# Altium PCB FSFB_SMPS.PcbDoc (part 1 of 2)
Units mm, origin at the board's own origin, x right, y up, seen from the top; angles counter-clockwise.
Board outline 100 x 100 mm, 2 copper layers (Top Layer, Bottom Layer); 97 components, 60 nets, 269 pads, 45 vias.
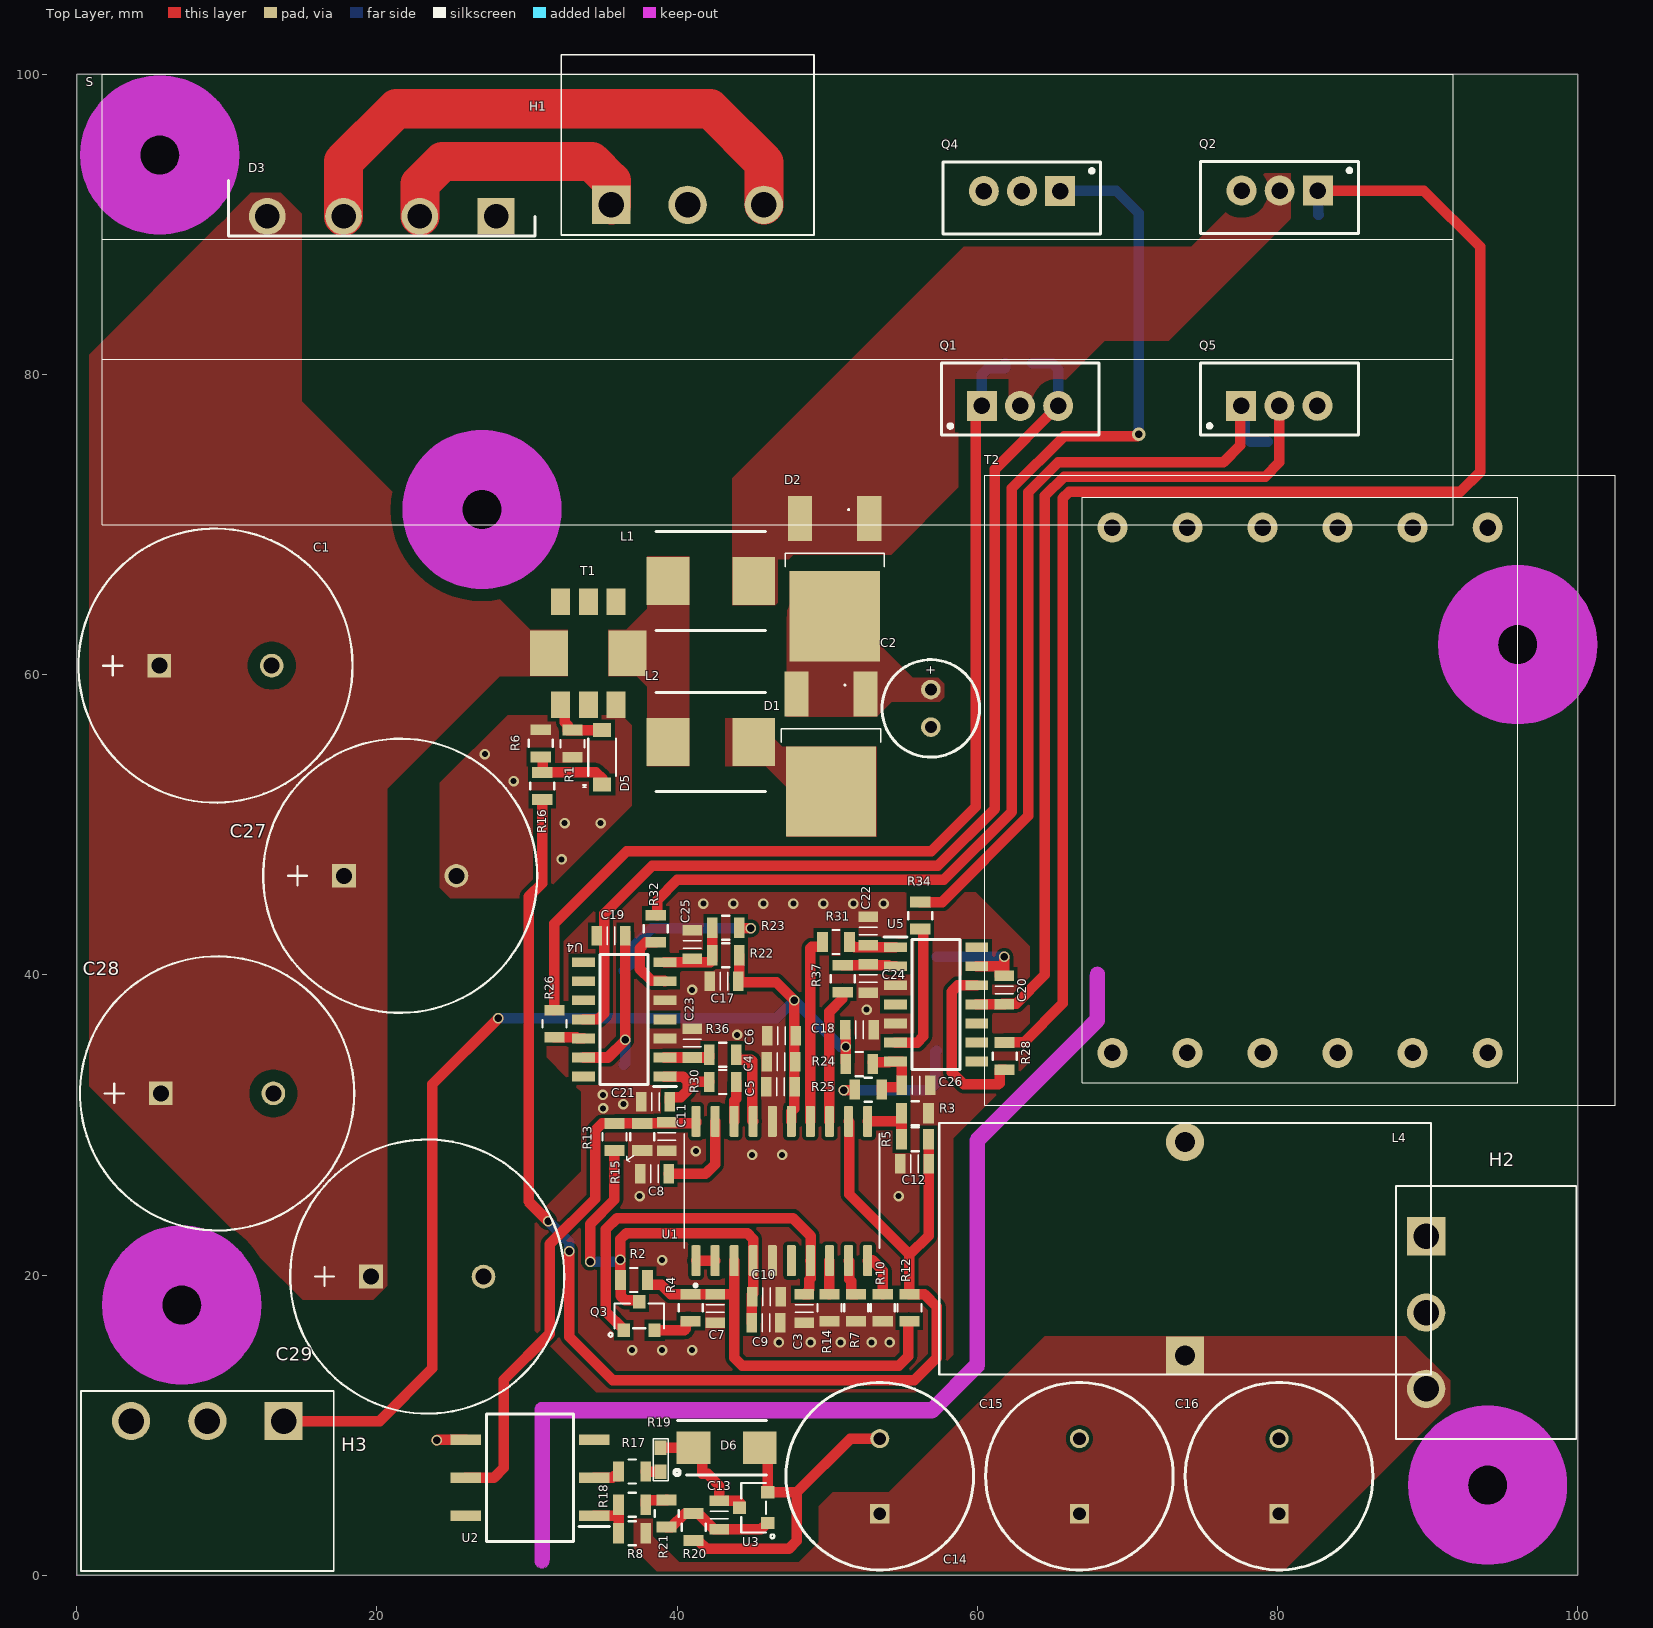
[diagram p0: Top Layer view]
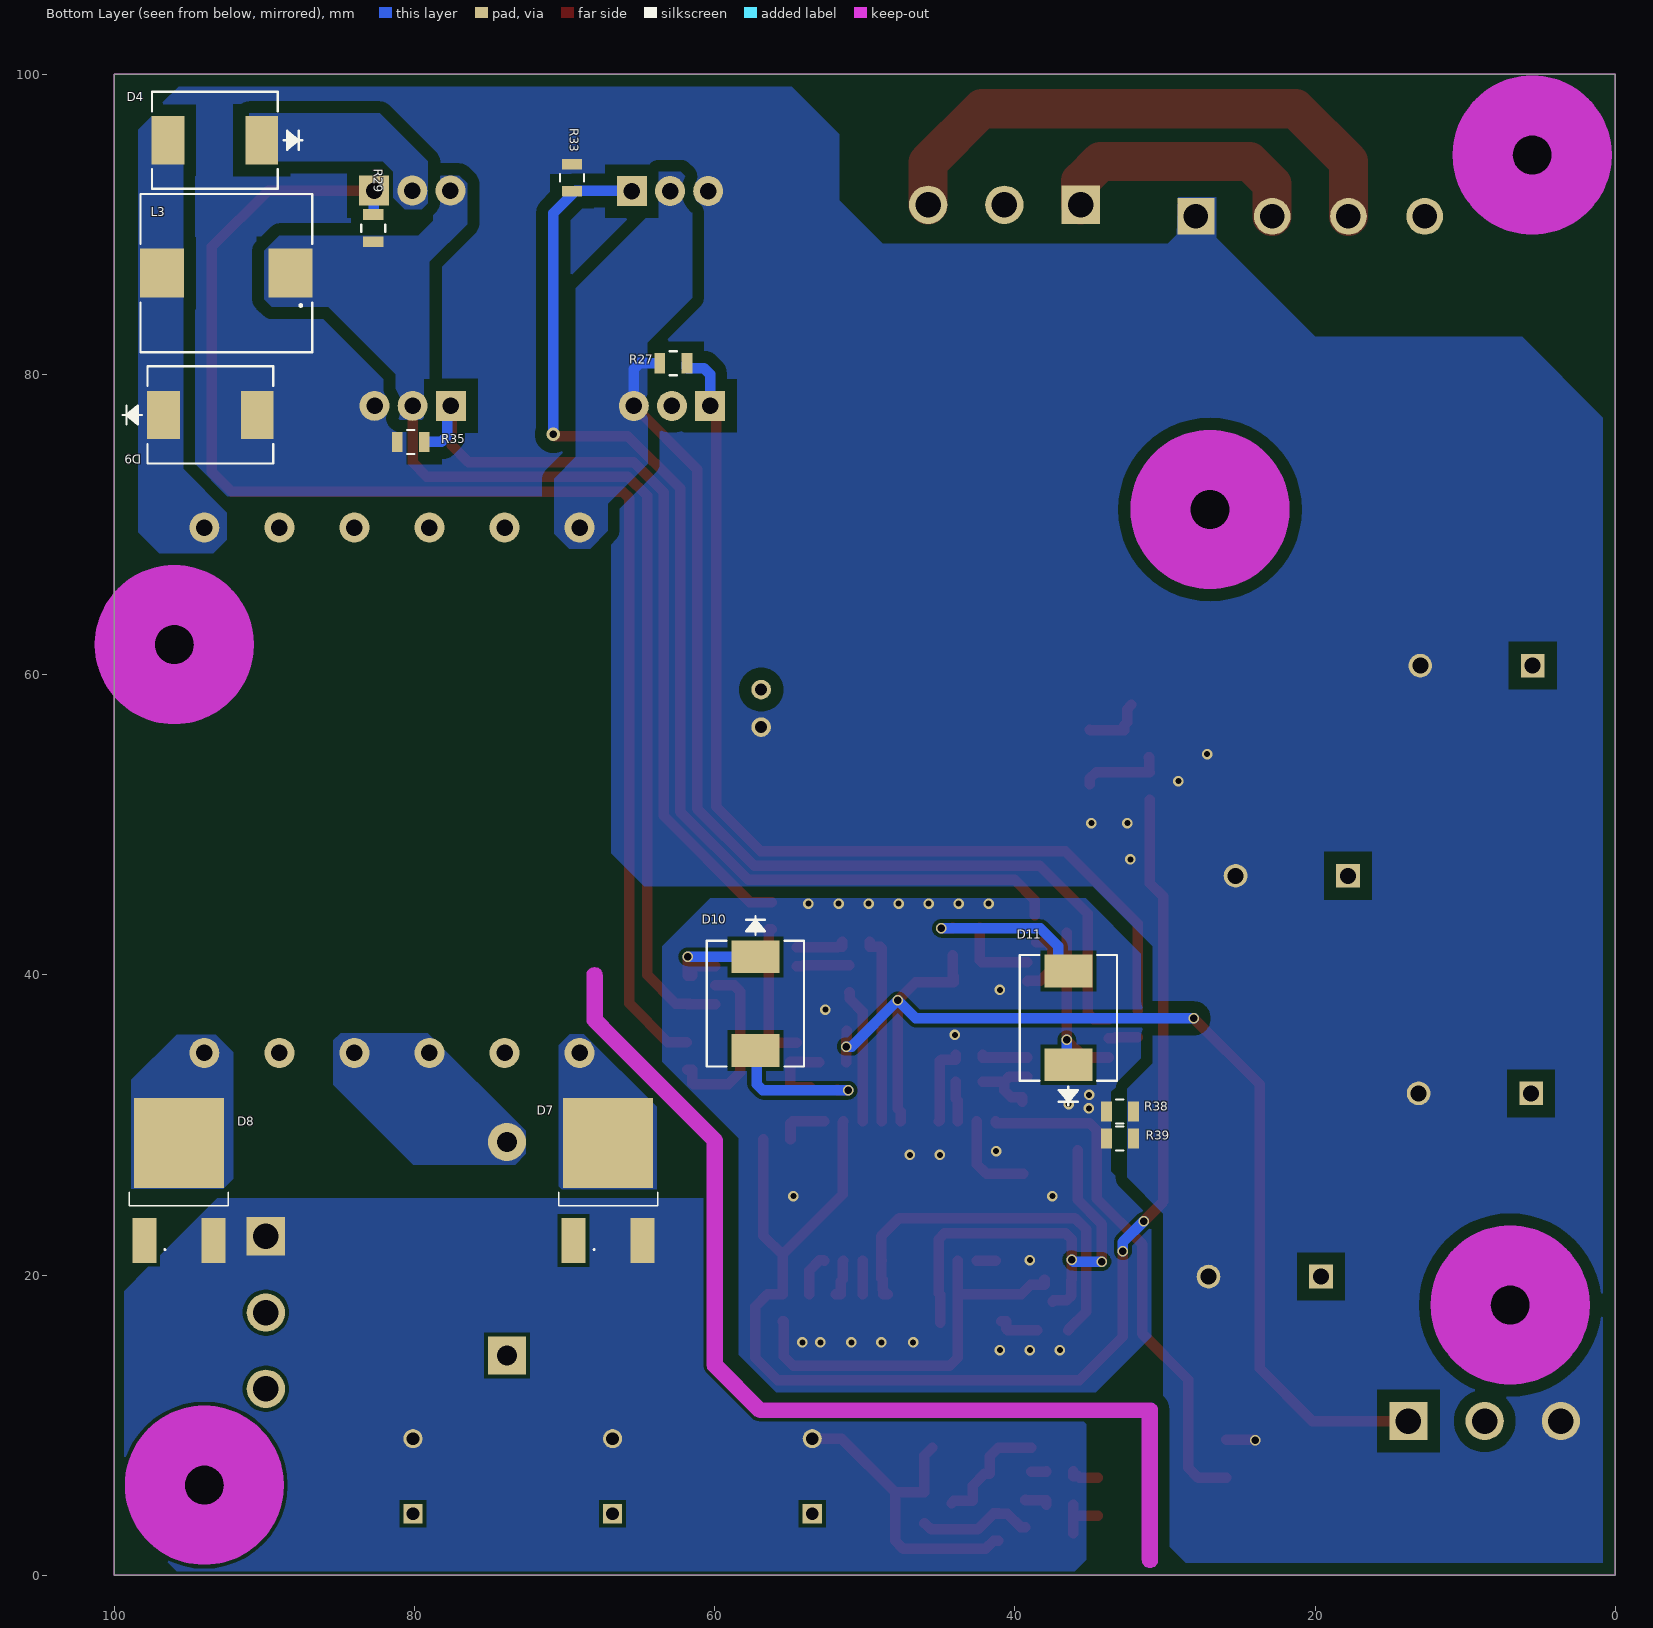
[diagram p1: Bottom Layer view, seen from below]
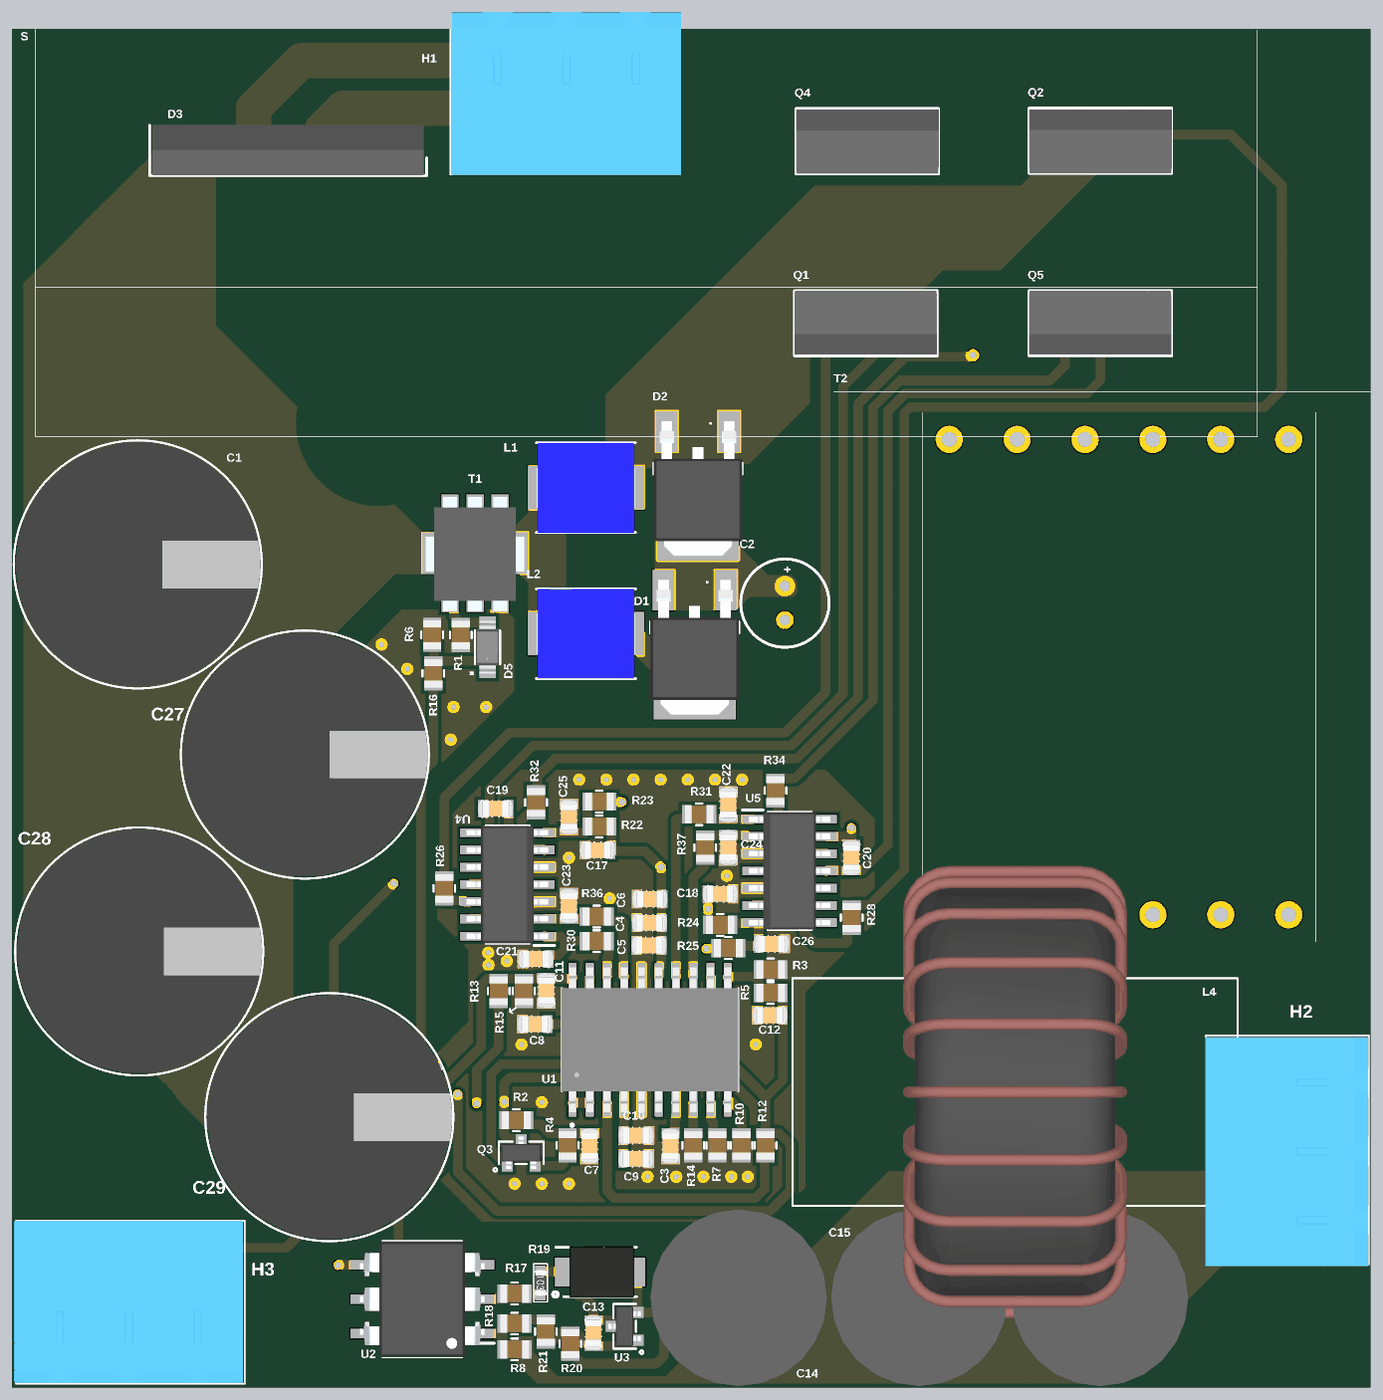
[diagram p2: 3D render of the assembled board from above, using the file's embedded part models]
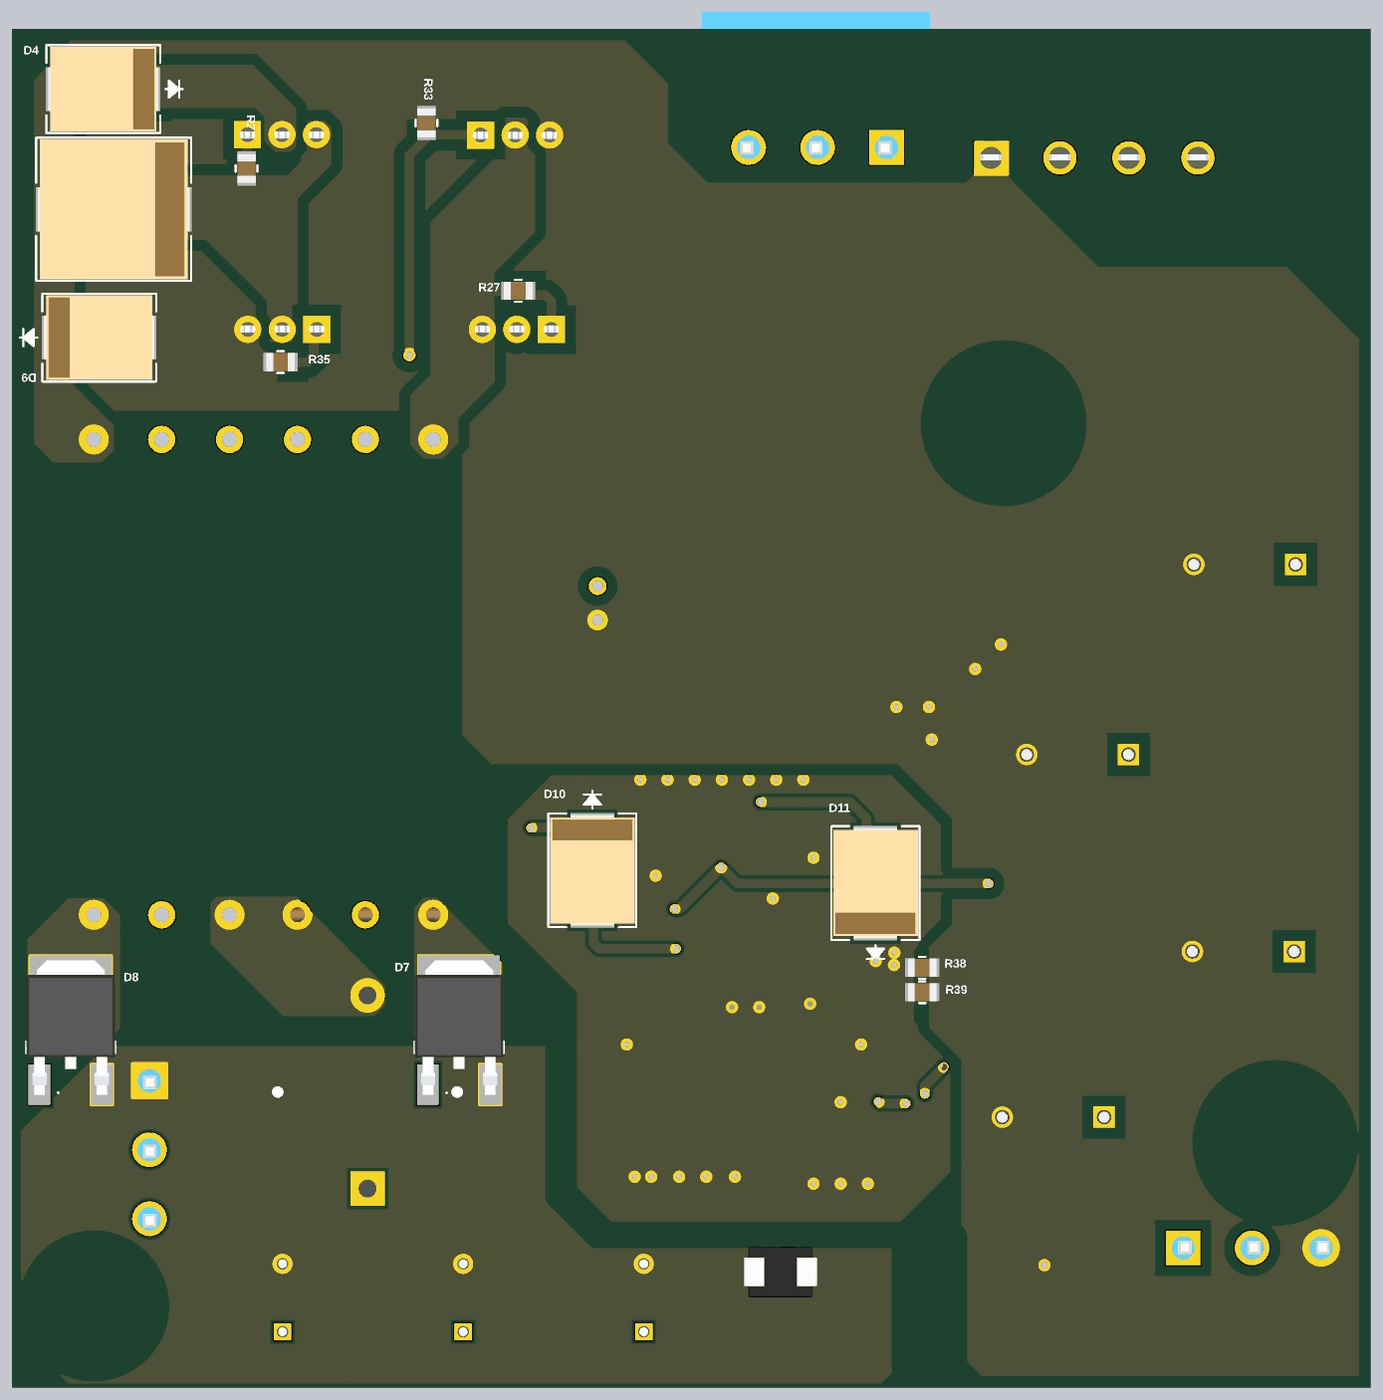
[diagram p3: 3D render of the assembled board from below, using the file's embedded part models]

## Layer stack, top to bottom
Top Solder: solder mask 0.0102, Solder Resist, Dk 3.5
Top Layer: signal copper 0.0356
Dielectric 1: dielectric 0.32, FR-4, Dk 4.8
Bottom Layer: signal copper 0.0356
Bottom Solder: solder mask 0.0102, Solder Resist, Dk 3.5

## Board outline
0,0 0,100 100,100 100,0
cut-out: 31.5,1 31.5,10.5 57,10.5 ccw(c57,11) 57.354,10.646 60.354,13.646 ccw(c60,14) 60.5,14 60.5,28.793 67.354,35.646 68.354,36.646 ccw(c68,37) 68.5,37 68.5,40 ccw(c68,40) 67.5,40 67.5,37.207 66.646,36.354 59.646,29.354 ccw(c60,29) 59.5,29 59.5,14.207 56.793,11.5 31,11.5 ccw(c31,11) 30.5,11 30.5,1 ccw(c31,1)
cut-out: 27,67.7 cw(c27,71) 23.7,71 cw(c27,71) 27,74.3 cw(c27,71) 30.3,71 cw(c27,71)
cut-out: 96,58.7 cw(c96,62) 92.7,62 cw(c96,62) 96,65.3 cw(c96,62) 99.3,62 cw(c96,62)
cut-out: 5.534,91.314 cw(c5.534,94.614) 2.234,94.614 cw(c5.534,94.614) 5.534,97.914 cw(c5.534,94.614) 8.834,94.614 cw(c5.534,94.614)
cut-out: 94,2.7 cw(c94,6) 90.7,6 cw(c94,6) 94,9.3 cw(c94,6) 97.3,6 cw(c94,6)
cut-out: 7,14.7 cw(c7,18) 3.7,18 cw(c7,18) 7,21.3 cw(c7,18) 10.3,18 cw(c7,18)

## Design rules (kind name [scope] priority, off if disabled: settings)
Clearance HSAB [InNet('HSAB') And OnLayer('Bottom Layer')] p1: gap=0.8 ignorepadtopadclearanceinfootprint=FALSE except(1.5: THPad-Via)
Clearance NETD2_1 [InNet('NetD2_1') And OnLayer('Top Layer')] p2: gap=0.8 ignorepadtopadclearanceinfootprint=FALSE except(1.5: THPad-Via)
Clearance RectAC [InNet('RectACLine') And OnLayer('Top Layer')] p3: gap=0.8 ignorepadtopadclearanceinfootprint=FALSE except(1.5: THPad-THPad)
Clearance HSCD [InNet('HSCD') And OnLayer('Bottom Layer')] p4: gap=0.8 ignorepadtopadclearanceinfootprint=FALSE except(1.5: THPad-THPad)
Clearance GNDHV_B [InNet('GND_HV') And OnLayer('Bottom Layer')] p5: gap=0.8 ignorepadtopadclearanceinfootprint=FALSE
Clearance [All] p6: gap=0.254 ignorepadtopadclearanceinfootprint=FALSE except(0.1: Arc-Text Track-Text SMDPad-Text THPad-Text Via-Text Fill-Text Poly-Text Region-Text Text-Text)
Height [All] p1: minheight=0 maxheight=70 prefheight=12.7
MinimumSolderMaskSliver [All] p1: minsoldermaskwidth=0.1
PolygonConnect [All] p1: connectstyle=Direct reliefconductorwidth=0.254 reliefentries=4 polygonreliefangle="90 Angle" airgapwidth=0.254
RoutingVias [All] p1: holewidth=0.4 width=0.7 viastyle="Through Hole" minholewidth=0.2 minwidth=0.3 maxholewidth=1 maxwidth=3
SilkToSolderMaskClearance [IsPad] p1: minsilkscreentomaskgap=0.05 clearancetoexposedcopper=TRUE
SolderMaskExpansion [All] p1: expansion=0.102 istentingtop=FALSE
Width [All] p1: maxlimit=7 minlimit=0.254 preferedwidth=0.6
27 further rules are at their usual default settings.

## Components (designator, comment, footprint, x,y, rotation, side; value= is the part's Value field where it differs from the comment)
C1 "120uF" 18AL_CAP 5.5,60.6 r0 top
C2 "0.47uF" 860021373001_PCB 56.9,57.75 r90 top
C3 "560pF" CAP_0805 48.475,17.775 r90 top
C4 "100nF" CAP_0805 46.925,34.216 r0 top
C5 "1uF" CAP_0805 46.9,32.55 r0 top
C6 "4.7uF" CAP_0805 46.959,35.957 r0 top
C7 "56pF" CAP_0805 42.525,17.775 r90 top
C8 "560pF" CAP_0805 38.5,26.75 r0 top
C9 "1uF" CAP_0805 45.934,16.837 r180 top
C10 "100nF" CAP_0805 45.947,18.543 r180 top
C11 "68nF" CAP_0805 39.325,29.225 r90 top
C12 "1uF" CAP_0805 55.8,27.4 r180 top
C13 "22nF" CAP_0805 42.8,4 r90 top
C14 "47uF" CAP200V47uF 53.5,4.1 r90 top
C15 "47uF" CAP200V47uF 66.8,4.1 r90 top
C16 "47uF" CAP200V47uF 80.1,4.1 r90 top
C17 "1uF" CAP_0805 43.112,39.569 r0 top
C18 "1uF" CAP_0805 52.135,36.34 r180 top
C19 "100nF" CAP_0805 35.6,42.6 r0 top
C20 "100nF" CAP_0805 61.8,39 r90 top
C21 "220pF" CAP_0805 38.555,31.545 r0 top
C22 "220pF" CAP_0805 52.724,42.907 r270 top
C23 "220pF" CAP_0805 40.996,35.443 r270 top
C24 "220pF" CAP_0805 52.724,39.761 r90 top
C25 "1uF" CAP_0805 40.996,42.006 r270 top
C26 "1uF" CAP_0805 55.918,32.658 r180 top
C27 "120uF" 18AL_CAP 17.807,46.6 r0 top
C28 "120uF" 18AL_CAP 5.607,32.1 r0 top
C29 "120uF" 18AL_CAP 19.607,19.9 r0 top
D1 "" DPAK(TO-252-2) 50.25,54.5 r180 top
D2 "" DPAK(TO-252-2) 50.5,66.19 r180 top
D3 "=Value" 4-SIP 27.937,90.532 r180 top
D4 "=Value" DO-214AB(SMC) 93.3,95.6 r0 bottom
D5 "=Value" SOD123 35,54.5 r90 top
D6 "=Value" DO_214AA 43.3,8.5 r0 top
D7 "=Value" DPAK(TO-252-2) 67.1,26.5 r180 bottom
D8 "=Value" DPAK(TO-252-2) 95.7,26.5 r180 bottom
D9 "=Value" DO-214AB(SMC) 93.6,77.3 r180 bottom
D10 "=Value" DO-214AB(SMC) 57.285,38.078 r270 bottom
D11 "=Value" DO-214AB(SMC) 36.437,37.134 r90 bottom
H1 "=Value" "3 x 5.08 POS" 35.62,91.3 r0 top
H2 "=Value" "3 x 5.08 POS" 89.9,22.58 r270 top
H3 "=Value" "3 x 5.08 POS" 13.782,10.275 r180 top
L1 "0.1UF" "7.30mm x 6.60mm" 42.25,66.25 r0 top
L2 "220nF" "7.30mm x 6.60mm" 42.25,55.5 r0 top
L3 "3.3uH" "14.4MOHM SMD" 92.53,86.75 r0 bottom
L4 "180uH" 2300HT-181-V-RC 74.35,21.5 r90 top
Q1 "=Value" TO220 62.849,77.904 r90 top
Q2 "=Value" TO220 80.142,92.245 r270 top
Q3 "=Value" SOT-23-3 37.475,17.275 r0 top
Q4 "=Value" TO220 62.975,92.215 r270 top
Q5 "=Value" TO220 80.122,77.908 r90 top
R1 "2K" RES_0805 33.036,55.404 r270 top
R2 "10K" RES_0805 37.125,19.675 r180 top
R3 "0R" RES_0805 55.85,30.775 r0 top
R4 "2K" RES_0805 40.9,17.825 r270 top
R5 "0R" RES_0805 55.85,29.05 r0 top
R6 "20R" RES_0805 30.922,55.418 r90 top
R7 "15K" RES_0805 51.925,17.825 r90 top
R8 "50R" RES_0805 37,2.8 r0 top
R10 "15K" RES_0805 53.7,17.825 r90 top
R12 "510R" RES_0805 55.475,17.825 r270 top
R13 "2K" RES_0805 35.825,29.2 r270 top
R14 "82K" RES_0805 50.15,17.825 r90 top
R15 "5.1K" RES_0805 37.675,29.2 r90 top
R16 "1K" RES_0805 31.011,52.581 r90 top
R17 "12K" RES_0805 37,6.912 r180 top
R18 "470K" RES_0805 37,4.7 r180 top
R19 "1.87K" RES_0603 38.9,7.7 r270 top
R20 "10K" RES_0805 41.1,3.212 r90 top
R21 "82K" RES_0805 39.301,4.114 r90 top
R22 "5R" RES_0805 43.238,41.303 r180 top
R23 "2R" RES_0805 43.238,43.139 r0 top
R24 "5R" RES_0805 52.135,34.053 r0 top
R25 "2R" RES_0805 52.735,32.353 r180 top
R26 "5R" RES_0805 31.825,36.75 r90 top
R27 "10K" RES_0805 62.75,80.75 r0 bottom
R28 "5R" RES_0805 61.82,34.588 r90 top
R29 "10K" RES_0805 82.75,89.75 r270 bottom
R30 "50R" RES_0805 43.038,32.861 r180 top
R31 "50R" RES_0805 50.585,42.194 r0 top
R32 "5R" RES_0805 38.575,43.075 r90 top
R33 "10K" RES_0805 69.5,93.1 r90 bottom
R34 "5R" RES_0805 56.204,43.95 r90 top
R35 "10K" RES_0805 80.25,75.5 r0 bottom
R36 "50R" RES_0805 43.038,34.674 r180 top
R37 "50R" RES_0805 51.032,39.748 r90 top
R38 "0R" RES_0805 33,30.9 r180 bottom
R39 "0R" RES_0805 33,29.1 r180 bottom
S "=Value" Sogutucu60x90 91.698,85 r180 top
T1 "1:100" PA1005.100QNLT 34.089,61.265 r0 top
T2 "=Value" FE0270 69,69.8 r0 top
U1 "UCC3895PWTR" 20-SOIC 46.975,25.6 r90 top
U2 "=VAlue" CNY172SM_FP 30.2,6.5 r180 top
U3 "=Value" SOT-23-3 45.1,4.5 r90 top
U4 "=Value" 14-SOP 36.47,37.033 r180 top
U5 "=Value" 14-SOP 57.253,38.029 r0 top

## Footprints (in the part's own frame and the unit in brackets; to place one, negate y for a bottom-side part, rotate by r counter-clockwise, add the part's x,y. Pads: shape width x height; smd on the part's side, far side on the other; paste and mask are expansions set on the pad)
"3 x 5.08 POS" [mm]
  rect 2.55x2.55 / inner round 2.55 / far side rect 2.55x2.55 hole 1.7: 1(0,0)
  round 2.55 hole 1.7: 2(5.08,0) 3(10.16,0)
  silkscreen extent -3.34,-2 13.5,10, body extent -3.21,-2.03 13.63,9.97, height 8.5
4-SIP [mm]
  rect 2.445x2.445 / inner round 2.445 / far side rect 2.445x2.445 hole 1.63: 1(0,0)
  round 2.445 hole 1.63: 2(5.08,0) 3(10.16,0) 4(15.24,0)
  silkscreen extent -2.58,-2.4 17.82,1.3, body extent -2.38,-2.43 17.62,1.27, height 13.1
"7.30mm x 6.60mm" [mm]
  rect 2.85x3.2 smd: 1(-2.85,0) 2(2.85,0)
  silkscreen extent -3.65,-3.3 3.65,3.3, body extent -3.65,-3.3 3.65,3.3, height 3
14-SOP [mm]
  rect 1.525x0.65 smd: 1(-2.712,3.81) 2(-2.712,2.54) 3(-2.712,1.27) 4(-2.712,0) 5(-2.712,-1.27) 6(-2.712,-2.54) 7(-2.712,-3.81) 8(2.712,-3.81) 9(2.712,-2.54) 10(2.712,-1.27) 11(2.712,0) 12(2.712,1.27) 13(2.712,2.54) 14(2.712,3.81)
  silkscreen extent -3.47,-4.33 1.6,4.48, body extent -3.01,-4.33 3.01,4.33, height 1.75
"14.4MOHM SMD" [mil]
  rect 115x128 smd paste+0 mask+0: 1(-168.5,0) 2(168.5,0)
  silkscreen extent -225,-208 225,208, body extent -220,-202 220,202, height 160
18AL_CAP [mil]
  rect 62x62 / inner round 60 / far side rect 62x62 hole 42 paste-31 mask+0: 1(0,0)
  round 62 / inner round 60 / far side round 62 hole 42 paste-31 mask+0: 2(295,0)
  silkscreen extent -212,-359 507,359, body extent -207,-354 503,354, height 1231
20-SOIC [mm]
  rrect25% 2.06x0.6 smd: 1(-4.64,5.715) 2(-4.64,4.445) 3(-4.64,3.175) 4(-4.64,1.905) 5(-4.64,0.635) 6(-4.64,-0.635) 7(-4.64,-1.905) 8(-4.64,-3.175) 9(-4.64,-4.445) 10(-4.64,-5.715) 11(4.64,-5.715) 12(4.64,-4.445) 13(4.64,-3.175) 14(4.64,-1.905) 15(4.64,-0.635) 16(4.64,0.635) 17(4.64,1.905) 18(4.64,3.175) 19(4.64,4.445) 20(4.64,5.715)
  silkscreen extent -6.39,-6.5 3.8,6.5, body extent -5.32,-6.5 5.32,6.5, height 2.64
2300HT-181-V-RC [mil]
  rect 100x100 hole 52 paste-36 mask+0: 1(-270,20)
  round 100 hole 52 paste-36 mask+0: 2(290,20)
  silkscreen extent -320,-625 340,665, body extent -315,-636 335,676, height 1280
860021373001_PCB [mm]
  round 1.308 hole 0.8 mask+0.102: 1(1.25,0) 2(-1.25,0)
  silkscreen extent -3.25,-3.25 3.25,3.25, body extent -3.25,-3.25 3.25,3.25, height 11
CAP200V47uF [mm]
  rect 1.275x1.275 / inner round 1.275 / far side rect 1.275x1.275 hole 0.85: 1(0,0)
  round 1.275 hole 0.85: 2(5,0)
  silkscreen extent -3.75,-6.25 8.75,6.25, body extent -4,-6.5 9,6.5, height 20
CAP_0805 [mm]
  rect 0.7x1.3 smd mask+0.05: 1(-0.95,0) 2(0.95,0)
  silkscreen extent -0.25,-0.6 0.25,0.6, body extent -1.3,-0.68 1.3,0.68, height 0.9
CNY172SM_FP [mm]
  rect 2.05x0.7 smd: 1(-4.275,2.54) 2(-4.275,0) 3(-4.275,-2.54) 4(4.275,-2.54) 5(4.275,0) 6(4.275,2.54)
  silkscreen extent -5.3,-4.26 2.9,4.26, body extent -4.58,-4.26 4.58,4.26, height 4.8
DO-214AB(SMC) [mil]
  rect 86x126 smd paste+0 mask+0: 1(-123,0) 2(123,0)
  silkscreen extent -230,-128 165,128, body extent -160,-123 160,123, height 105
DO_214AA [mm]
  rect 2.25x2.15 smd: A(2.2,0) C(-2.2,0)
  silkscreen extent -3.48,-1.83 2.67,1.81, body extent -2.57,-1.9 2.83,1.91, height 0.94
DPAK(TO-252-2) [mm]
  rect 1.6x3 smd: 1(-2.3,-4.2) 3(2.3,-4.2)
  rect 6x6 smd: 2(0,2.3)
  silkscreen extent -3.3,-4.85 3.3,-1, body extent -3.27,-4.96 3.27,4.96, height 2.39
FE0270 [mm]
  round 2 hole 1.1: 1(0,0) 2(5,0) 3(10,0) 4(15,0) 5(20,0) 6(25,0) 7(25,-35) 8(20,-35) 9(15,-35) 10(10,-35) 11(5,-35) 12(0,-35)
  silkscreen extent -8.5,-38.5 33.5,3.5, body extent -8.5,-38.5 33.5,3.5, height 34.25
PA1005.100QNLT [mm]
  rect 1.27x1.78 smd: 1(-1.85,-3.273) 2(0,-3.273) 3(1.85,-3.273) 4(1.85,3.597) 5(0,3.597) 6(-1.85,3.597)
  rect 2.54x3.05 smd: 7(2.615,0.162) 8(-2.615,0.162)
  body extent -3.63,-4.11 3.63,4.29, height 5.1
RES_0603 [mil]
  rect 38x31 smd mask+1.97: 1(-31.5,0) 2(31.5,0)
  silkscreen extent -55,-20 55,20, body extent -39,-19 39,20, height 17
RES_0805 [mil]
  rect 28x53 smd paste+0 mask+0: 1(-35.5,0) 2(35.5,0)
  silkscreen extent -9,-32 9,32, body extent -41,-26 41,26, height 24
SOD123 [mil]
  rect 36.98x48 smd paste+0 mask+0: 1(-71.49,0) 2(71.49,0)
  silkscreen extent -79,-36 49,50, body extent -76,-31 76,31, height 53
Sogutucu60x90 [mm]
  silkscreen extent 0,-15 90,15, body extent 0,-15 90,15, height 60
SOT-23-3 [mil]
  rect 32x35 smd paste+0 mask+0: 1(-40.35,-37.2) 2(40.35,-37.2) 3(0,37.2)
  silkscreen extent -80,-54 65,33, body extent -57,-47 57,47, height 45
TO220 [mm]
  rect 2x2 hole 1.1 paste+0 mask+0: 1(0,2.54)
  round 2 hole 1.1 paste+0 mask+0: 2(0,0) 3(0,-2.54)
  silkscreen extent -1.95,-5.26 2.85,5.24, body extent -1.87,-5.25 2.84,5.25, height 18.01

## Part data
C1 C27 C28 C29: library part 63, "120 µF 400 V Aluminum Electrolytic Capacitors Radial, Can 12000 Hrs @ 105°C", Case/Package=Radial, Manufacturer=Nichicon, MANUFACTURER P/N=UCY2G121MHD, Manufacturer Part Number=EEV686M035A9HAA, Max Operating Temperature=105°C, Min Operating Temperature=-40°C, Package Quantity=1, Ripple Current=196mA, Supplier Part Number 1=493-5466-ND, Tolerance=20%, Voltage Rating=35V, Category="Aluminum Electrolytic Capacitors", ComponentLink1Description=datasheet, ComponentLink1URL=https://www.nichicon.co.jp/english/series_items/catalog_pdf/e-ucy.pdf, Designator by=BERK, Height - Seated (Max)=0.315inch, Length=7.7mm, Life (Hours)=2000Hour, Mount="Surface Mount", Packaging="Tape and Reel", Pricing 1="1=0,54000, 10=0,38000, 50=0,28740, 100=0,25040, 500=0,18546 (USD)", RoHS=Yes, RoHS Compliant=Yes, Series=EEV, Stoc Code=63, Stock 1=543, Supplier 1=Digikey, Termination=SMD/SMT, Voltage Rating (DC)=35V, Impedance=340mR
C2: library part 60, "0.47 µF 400 V Aluminum Electrolytic Capacitors Radial, Can 2000 Hrs @ 105°C", Case/Package=Radial, Manufacturer="Würth Elektronik", MANUFACTURER P/N=860021373001, Manufacturer Part Number=EEV686M035A9HAA, Max Operating Temperature=105°C, Min Operating Temperature=-40°C, Package Quantity=1, Ripple Current=196mA, Supplier Part Number 1=732-8879-1-ND, Tolerance=20%, Voltage Rating=35V, Category="Aluminum Electrolytic Capacitors", ComponentLink1Description=https://datasheet.ciiva.com/5365/kem-a4002-eev-535332-5365784.pdf?src-supplier=Mouser, ComponentLink1URL=https://datasheet.ciiva.com/5365/kem-a4002-eev-535332-5365784.pdf?src-supplier=Mouser, Designator by=BERK, Height - Seated (Max)=0.315inch, Length=7.7mm, Life (Hours)=2000Hour, Mount="Surface Mount", Packaging="Tape and Reel", Pricing 1="1=0,54000, 10=0,38000, 50=0,28740, 100=0,25040, 500=0,18546 (USD)", RoHS=Yes, RoHS Compliant=Yes, Series=EEV, Stoc Code=60, Stock 1=543, Supplier 1=Digikey, Termination=SMD/SMT, Voltage Rating (DC)=35V, Impedance=340mR
C3 C8: library part 27, "Cap.,SMD,0805,NP0,560pF,5%,100V", Case Code (Metric)=2012, Case Code (Imperial)=0805, Dielectric=X7R, Manufacturer=Aillen, MANUFACTURER P/N=0805N561J101AD, Manufacturer Part Number=CL21B105KBFNNNE, Max Operating Temperature=125°C, Min Operating Temperature=-55°C, Package Quantity=1, Supplier Part Number 1=3372-0805N561J101ADTR-ND, Tolerance=10%, Voltage=50V, Case/Package=0805, Category="Ceramic Capacitors", ComponentLink1Description=https://datasheet.ciiva.com/25800/cl21b105kbfnnne-25800291.pdf?src-supplier=Digi-Key, ComponentLink1URL=https://datasheet.ciiva.com/25800/cl21b105kbfnnne-25800291.pdf?src-supplier=Digi-Key, ComponentLink2Description=https://datasheet.ciiva.com/16449/cl21b105kbfnnne-16449003.pdf?src-supplier=Future+Electronics, ComponentLink2URL=https://datasheet.ciiva.com/16449/cl21b105kbfnnne-16449003.pdf?src-supplier=Future+Electronics, ComponentLink3Description=https://datasheet.ciiva.com/26838/getdatasheetpartid-354075-26838668.pdf?src-supplier=Verical, ComponentLink3URL=https://datasheet.ciiva.com/26838/getdatasheetpartid-354075-26838668.pdf?src-supplier=Verical, Construction=Flat, Depth=1.25mm, Designed by=BERK, Height=1.25mm, Length=2mm, Mount="Surface Mount", Packaging="Tape and Reel", Pricing 1="2000=0,02138, 4000=0,01956 (USD)", Radiation Hardening=No, RoHS=Yes, RoHS Compliant=Yes, Series=CL, Stoc Code=27, Stock 1=958000, Supplier 1=Digikey, Thickness=0.053inch, Voltage Rating=50V, Width=0.049inch
C4 C10 C19 C20: library part 31, "Auto. MLCC X7R 100nF 10% 100V 08", Case Code (Metric)=2012, Case Code (Imperial)=0805, Dielectric=X7R, Manufacturer="EYang Technology", MANUFACTURER P/N=E0805X7R104K101NTY, Manufacturer Part Number=CL21B105KBFNNNE, Max Operating Temperature=125°C, Min Operating Temperature=-55°C, Package Quantity=1, Supplier Part Number 1=3372-E0805X7R104K101NTYTR-ND, Tolerance=10%, Voltage=50V, Case/Package=0805, Category="Ceramic Capacitors", ComponentLink1Description=https://datasheet.ciiva.com/25800/cl21b105kbfnnne-25800291.pdf?src-supplier=Digi-Key, ComponentLink1URL=https://datasheet.ciiva.com/25800/cl21b105kbfnnne-25800291.pdf?src-supplier=Digi-Key, ComponentLink2Description=https://datasheet.ciiva.com/16449/cl21b105kbfnnne-16449003.pdf?src-supplier=Future+Electronics, ComponentLink2URL=https://datasheet.ciiva.com/16449/cl21b105kbfnnne-16449003.pdf?src-supplier=Future+Electronics, ComponentLink3Description=https://datasheet.ciiva.com/26838/getdatasheetpartid-354075-26838668.pdf?src-supplier=Verical, ComponentLink3URL=https://datasheet.ciiva.com/26838/getdatasheetpartid-354075-26838668.pdf?src-supplier=Verical, Construction=Flat, Depth=1.25mm, Designed by=BERK, Height=1.25mm, Length=2mm, Mount="Surface Mount", Packaging="Tape and Reel", Pricing 1="2000=0,02138, 4000=0,01956 (USD)", Radiation Hardening=No, RoHS=Yes, RoHS Compliant=Yes, Series=CL, Stoc Code=31, Stock 1=958000, Supplier 1=Digikey, Thickness=0.053inch, Voltage Rating=50V, Width=0.049inch
C5 C9 C12 C17 C18 C25 C26: library part 22, "CAP SMD,0805,X7R,1UF,10%,50V", Case Code (Metric)=2012, Case Code (Imperial)=0805, Dielectric=X7R, Manufacturer=Aillen, MANUFACTURER P/N=0805B105K500CC, Manufacturer Part Number=CL21B105KBFNNNE, Max Operating Temperature=125°C, Min Operating Temperature=-55°C, Package Quantity=1, Supplier Part Number 1=3372-0805B105K500CCTR-ND, Tolerance=10%, Voltage=50V, Case/Package=0805, Category="Ceramic Capacitors", ComponentLink1Description=https://datasheet.ciiva.com/25800/cl21b105kbfnnne-25800291.pdf?src-supplier=Digi-Key, ComponentLink1URL=https://datasheet.ciiva.com/25800/cl21b105kbfnnne-25800291.pdf?src-supplier=Digi-Key, ComponentLink2Description=https://datasheet.ciiva.com/16449/cl21b105kbfnnne-16449003.pdf?src-supplier=Future+Electronics, ComponentLink2URL=https://datasheet.ciiva.com/16449/cl21b105kbfnnne-16449003.pdf?src-supplier=Future+Electronics, ComponentLink3Description=https://datasheet.ciiva.com/26838/getdatasheetpartid-354075-26838668.pdf?src-supplier=Verical, ComponentLink3URL=https://datasheet.ciiva.com/26838/getdatasheetpartid-354075-26838668.pdf?src-supplier=Verical, Construction=Flat, Depth=1.25mm, Designed by=BERK, Height=1.25mm, Length=2mm, Mount="Surface Mount", Packaging="Tape and Reel", Pricing 1="2000=0,02138, 4000=0,01956 (USD)", Radiation Hardening=No, RoHS=Yes, RoHS Compliant=Yes, Series=CL, Stoc Code=22, Stock 1=958000, Supplier 1=Digikey, Thickness=0.053inch, Voltage Rating=50V, Width=0.049inch
C6: library part 32, "CAP,SMD,0805,X7R,4.7UF,10%,25V", Case Code (Metric)=2012, Case Code (Imperial)=0805, Dielectric=X7R, Manufacturer="NextGen Components", MANUFACTURER P/N=0805B475K250CC, Manufacturer Part Number=CL21B105KBFNNNE, Max Operating Temperature=125°C, Min Operating Temperature=-55°C, Package Quantity=1, Supplier Part Number 1=3372-0805B475K250CCTR-ND, Tolerance=10%, Voltage=50V, Case/Package=0805, Category="Ceramic Capacitors", ComponentLink1Description=https://datasheet.ciiva.com/25800/cl21b105kbfnnne-25800291.pdf?src-supplier=Digi-Key, ComponentLink1URL=https://datasheet.ciiva.com/25800/cl21b105kbfnnne-25800291.pdf?src-supplier=Digi-Key, ComponentLink2Description=https://datasheet.ciiva.com/16449/cl21b105kbfnnne-16449003.pdf?src-supplier=Future+Electronics, ComponentLink2URL=https://datasheet.ciiva.com/16449/cl21b105kbfnnne-16449003.pdf?src-supplier=Future+Electronics, ComponentLink3Description=https://datasheet.ciiva.com/26838/getdatasheetpartid-354075-26838668.pdf?src-supplier=Verical, ComponentLink3URL=https://datasheet.ciiva.com/26838/getdatasheetpartid-354075-26838668.pdf?src-supplier=Verical, Construction=Flat, Depth=1.25mm, Designed by=BERK, Height=1.25mm, Length=2mm, Mount="Surface Mount", Packaging="Tape and Reel", Pricing 1="2000=0,02138, 4000=0,01956 (USD)", Radiation Hardening=No, RoHS=Yes, RoHS Compliant=Yes, Series=CL, Stoc Code=32, Stock 1=958000, Supplier 1=Digikey, Thickness=0.053inch, Voltage Rating=50V, Width=0.049inch
C7: library part 26, "CAP,SMD,0805,NP0,56PF,5%,50V", Case Code (Metric)=2012, Case Code (Imperial)=0805, Dielectric=X7R, Manufacturer="NextGen Components", MANUFACTURER P/N=0805N560J500AD, Manufacturer Part Number=CL21B105KBFNNNE, Max Operating Temperature=125°C, Min Operating Temperature=-55°C, Package Quantity=1, Supplier Part Number 1=3372-0805N560J500ADTR-ND, Tolerance=10%, Voltage=50V, Case/Package=0805, Category="Ceramic Capacitors", ComponentLink1Description=https://datasheet.ciiva.com/25800/cl21b105kbfnnne-25800291.pdf?src-supplier=Digi-Key, ComponentLink1URL=https://datasheet.ciiva.com/25800/cl21b105kbfnnne-25800291.pdf?src-supplier=Digi-Key, ComponentLink2Description=https://datasheet.ciiva.com/16449/cl21b105kbfnnne-16449003.pdf?src-supplier=Future+Electronics, ComponentLink2URL=https://datasheet.ciiva.com/16449/cl21b105kbfnnne-16449003.pdf?src-supplier=Future+Electronics, ComponentLink3Description=https://datasheet.ciiva.com/26838/getdatasheetpartid-354075-26838668.pdf?src-supplier=Verical, ComponentLink3URL=https://datasheet.ciiva.com/26838/getdatasheetpartid-354075-26838668.pdf?src-supplier=Verical, Construction=Flat, Depth=1.25mm, Designed by=BERK, Height=1.25mm, Length=2mm, Mount="Surface Mount", Packaging="Tape and Reel", Pricing 1="2000=0,02138, 4000=0,01956 (USD)", Radiation Hardening=No, RoHS=Yes, RoHS Compliant=Yes, Series=CL, Stoc Code=26, Stock 1=958000, Supplier 1=Digikey, Thickness=0.053inch, Voltage Rating=50V, Width=0.049inch
C11: library part 34, "CAP CER 0805 68NF 50V X7R 10%", Case Code (Metric)=2012, Case Code (Imperial)=0805, Dielectric=X7R, Manufacturer=KEMET, MANUFACTURER P/N=C0805C683K5RECAUTO, Manufacturer Part Number=CL21B105KBFNNNE, Max Operating Temperature=125°C, Min Operating Temperature=-55°C, Package Quantity=1, Supplier Part Number 1=399-C0805C683K5RECAUTOTR-ND, Tolerance=10%, Voltage=50V, Case/Package=0805, Category="Ceramic Capacitors", ComponentLink1Description=https://datasheet.ciiva.com/25800/cl21b105kbfnnne-25800291.pdf?src-supplier=Digi-Key, ComponentLink1URL=https://datasheet.ciiva.com/25800/cl21b105kbfnnne-25800291.pdf?src-supplier=Digi-Key, ComponentLink2Description=https://datasheet.ciiva.com/16449/cl21b105kbfnnne-16449003.pdf?src-supplier=Future+Electronics, ComponentLink2URL=https://datasheet.ciiva.com/16449/cl21b105kbfnnne-16449003.pdf?src-supplier=Future+Electronics, ComponentLink3Description=https://datasheet.ciiva.com/26838/getdatasheetpartid-354075-26838668.pdf?src-supplier=Verical, ComponentLink3URL=https://datasheet.ciiva.com/26838/getdatasheetpartid-354075-26838668.pdf?src-supplier=Verical, Construction=Flat, Depth=1.25mm, Designed by=BERK, Height=1.25mm, Length=2mm, Mount="Surface Mount", Packaging="Tape and Reel", Pricing 1="2000=0,02138, 4000=0,01956 (USD)", Radiation Hardening=No, RoHS=Yes, RoHS Compliant=Yes, Series=CL, Stoc Code=34, Stock 1=958000, Supplier 1=Digikey, Thickness=0.053inch, Voltage Rating=50V, Width=0.049inch
C13: library part 40, "CAP CER 0805 22NF 200V X7R 10%", Case Code (Metric)=2012, Case Code (Imperial)=0805, Dielectric=X7R, Manufacturer=KEMET, MANUFACTURER P/N=C0805C223K2RECAUTO, Manufacturer Part Number=CL21B105KBFNNNE, Max Operating Temperature=125°C, Min Operating Temperature=-55°C, Package Quantity=1, Supplier Part Number 1=399-C0805C223K2RECAUTOTR-ND, Tolerance=10%, Voltage=50V, Case/Package=0805, Category="Ceramic Capacitors", ComponentLink1Description=https://datasheet.ciiva.com/25800/cl21b105kbfnnne-25800291.pdf?src-supplier=Digi-Key, ComponentLink1URL=https://datasheet.ciiva.com/25800/cl21b105kbfnnne-25800291.pdf?src-supplier=Digi-Key, ComponentLink2Description=https://datasheet.ciiva.com/16449/cl21b105kbfnnne-16449003.pdf?src-supplier=Future+Electronics, ComponentLink2URL=https://datasheet.ciiva.com/16449/cl21b105kbfnnne-16449003.pdf?src-supplier=Future+Electronics, ComponentLink3Description=https://datasheet.ciiva.com/26838/getdatasheetpartid-354075-26838668.pdf?src-supplier=Verical, ComponentLink3URL=https://datasheet.ciiva.com/26838/getdatasheetpartid-354075-26838668.pdf?src-supplier=Verical, Construction=Flat, Depth=1.25mm, Designed by=BERK, Height=1.25mm, Length=2mm, Mount="Surface Mount", Packaging="Tape and Reel", Pricing 1="2000=0,02138, 4000=0,01956 (USD)", Radiation Hardening=No, RoHS=Yes, RoHS Compliant=Yes, Series=CL, Stoc Code=40, Stock 1=958000, Supplier 1=Digikey, Thickness=0.053inch, Voltage Rating=50V, Width=0.049inch
C14 C15 C16: library part 54, "CAP ALUM 47UF 20% 200V RADIAL TH", Case/Package=Radial, Manufacturer="KYOCERA AVX", MANUFACTURER P/N=REH1218470M200K, Manufacturer Part Number=EEV686M035A9HAA, Max Operating Temperature=105°C, Min Operating Temperature=-40°C, Package Quantity=1, Ripple Current=196mA, Supplier Part Number 1=478-REH1218470M200KCT-ND, Tolerance=20%, Voltage Rating=35V, Category="Aluminum Electrolytic Capacitors", ComponentLink1Description=datasheet, ComponentLink1URL=https://datasheets.kyocera-avx.com/reh-series.pdf, Designator by=BERK, Height - Seated (Max)=0.315inch, Length=7.7mm, Life (Hours)=2000Hour, Mount="Surface Mount", Packaging="Tape and Reel", Pricing 1="1=0,54000, 10=0,38000, 50=0,28740, 100=0,25040, 500=0,18546 (USD)", RoHS=Yes, RoHS Compliant=Yes, Series=EEV, Stoc Code=54, Stock 1=543, Supplier 1=Digikey, Termination=SMD/SMT, Voltage Rating (DC)=35V, Impedance=340mR
C21 C22 C23 C24: library part 44, "CAP CER 220PF 250V C0G/NP0 0805", Case Code (Metric)=2012, Case Code (Imperial)=0805, Dielectric=X7R, Manufacturer="KYOCERA AVX", MANUFACTURER P/N=600F221JT250XT4K, Manufacturer Part Number=CL21B105KBFNNNE, Max Operating Temperature=125°C, Min Operating Temperature=-55°C, Package Quantity=1, Supplier Part Number 1=478-600F221JT250XT4KTR-ND, Tolerance=10%, Voltage=50V, Case/Package=0805, Category="Ceramic Capacitors", ComponentLink1Description=https://datasheet.ciiva.com/25800/cl21b105kbfnnne-25800291.pdf?src-supplier=Digi-Key, ComponentLink1URL=https://datasheet.ciiva.com/25800/cl21b105kbfnnne-25800291.pdf?src-supplier=Digi-Key, ComponentLink2Description=https://datasheet.ciiva.com/16449/cl21b105kbfnnne-16449003.pdf?src-supplier=Future+Electronics, ComponentLink2URL=https://datasheet.ciiva.com/16449/cl21b105kbfnnne-16449003.pdf?src-supplier=Future+Electronics, ComponentLink3Description=https://datasheet.ciiva.com/26838/getdatasheetpartid-354075-26838668.pdf?src-supplier=Verical, ComponentLink3URL=https://datasheet.ciiva.com/26838/getdatasheetpartid-354075-26838668.pdf?src-supplier=Verical, Construction=Flat, Depth=1.25mm, Designed by=BERK, Height=1.25mm, Length=2mm, Mount="Surface Mount", Packaging="Tape and Reel", Pricing 1="2000=0,02138, 4000=0,01956 (USD)", Radiation Hardening=No, RoHS=Yes, RoHS Compliant=Yes, Series=CL, Stoc Code=44, Stock 1=958000, Supplier 1=Digikey, Thickness=0.053inch, Voltage Rating=50V, Width=0.049inch
D1 D2: library part 57, "DIODE STANDARD 600V 20A DPAK", Manufacturer="SMC Diode Solutions", MANUFACTURER P/N=SDURD2060, Supplier Part Number 1=1655-SDURD2060TR-ND, ComponentLink1Description=datasheet, ComponentLink1URL=https://www.smc-diodes.com/propdf/SDURD2060%20N1569%20REV.A.pdf, Stoc Code=57, Supplier 1=Digikey
D3: library part 55, "Bridge Rectifier Single Phase Standard 1 kV Through Hole GBU", Manufacturer="MCC (Micro Commercial Components)", MANUFACTURER P/N=GBUA10M-BP, Supplier Part Number 1=353-GBUA10M-BP-ND, ComponentLink1Description=datasheet, ComponentLink1URL=https://www.mccsemi.com/pdf/Products/GBUA10M(JC).pdf, Stoc Code=55, Supplier 1=Digikey
D4 D9 D10 D11: library part 46, "Diode 600 V 3A Surface Mount SMC", Average Rectified Current=150mA, Forward Voltage=1V, Manufacturer=onsemi, MANUFACTURER P/N=MURS360T3G, Max Forward Surge Current (Ifsm)=2A, Max Operating Temperature=150°C, Max Repetitive Reverse Voltage (Vrrm)=75V, Max Reverse Current=5uA, Min Operating Temperature=-55°C, Package Quantity=1, Power Dissipation=200mW, Supplier Part Number 1=MURS360T3GOSTR-ND, Category="Rectifier Diodes", ComponentLink1Description=https://datasheet.ciiva.com/25968/1n914bws-25968945.pdf?src-supplier=Avnet+Europe, ComponentLink2Description=https://datasheet.ciiva.com/30479/0900766b810e1cd3-30479206.pdf?src-supplier=RSComponents, ComponentLink3Description=https://datasheet.ciiva.com/910/1n4148ws-910381.pdf?src-supplier=Digi-Key, ComponentLink4Description=https://datasheet.ciiva.com/15208/getdatasheetpartid-127819-15208358.pdf?src-supplier=Verical, ComponentLink5Description=https://datasheet.ciiva.com/8300/1n914bws-8300360.pdf?src-supplier=Avnet, ComponentLink6Description=https://datasheet.ciiva.com/910/1n4148ws-910380.pdf?src-supplier=Digi-Key, ComponentLink6URL=https://datasheet.ciiva.com/910/1n4148ws-910380.pdf?src-supplier=Digi-Key, ComponentLink7Description=https://datasheet.ciiva.com/910/1n4148ws-910382.pdf?src-supplier=Digi-Key, ComponentLink7URL=https://datasheet.ciiva.com/910/1n4148ws-910382.pdf?src-supplier=Digi-Key, Contact Plating=Tin,Matte, Designed by=Yunus, Element Configuration=Single, Forward Current=150mA, Height=1mm, Lead Free="Lead Free", Length=1.8mm, Max Reverse Voltage (DC)=75V, Mount="Surface Mount", Number of Pins=2, Packaging="Tape and Reel", Pricing 1="1=0,17000, 10=0,12100, 100=0,06530, 500=0,05128, 1000=0,03562 (USD)", Radiation Hardening=No, REACH SVHC="No SVHC", Recovery Time=4ns, Reverse Recovery Time=4ns, Reverse Voltage=75V, RoHS Compliant=Yes, Series=-, Stoc Code=46, Stock 1=79118, Supplier 1=Digikey, Weight=0.0276g, Width=1.35mm
D5: library part 18, "Diode 30 V 200mA Surface Mount SOD-123", Manufacturer=onsemi, MANUFACTURER P/N=BAT54T1, Supplier Part Number 1=BAT54T1OSTR-ND, ComponentLink1Description=datasheet, ComponentLink1URL=https://www.onsemi.com/pdf/datasheet/bat54t1-d.pdf, Stoc Code=18, Supplier 1=Digikey
D6: library part 38, "DIODE ZENER 140V 5W DO214AA", Breakdown Voltage=5.88V, Case/Package=SMB, Forward Voltage=1.5V, Manufacturer="MCC (Micro Commercial Components)", MANUFACTURER P/N=SMBJ5382B-TP, Manufacturer Part Number=9BT3G, Max Operating Temperature=150°C, Max Power Dissipation=3W, Max Reverse Current=5uA, Min Operating Temperature=-65°C, Package Quantity=1, Power Dissipation=550mW, Supplier Part Number 1=SMBJ5382B-TPMSTR-ND, Test Current=66.9mA, Tolerance=5%, Voltage Rating (DC)=5.6V, Zener Current=267mA, Category="Zener Diodes", ComponentLink1Description=datasheet, ComponentLink1URL=https://www.mccsemi.com/pdf/Products/SMBJ5338B-SMBJ5388B(SMB).pdf, ComponentLink2Description=https://datasheet.ciiva.com/1182/1smb5913bt3-d-1182657.pdf?src-supplier=Element14, ComponentLink3Description=https://datasheet.ciiva.com/1182/1smb5913bt3-d-1182658.pdf?src-supplier=Element14, ComponentLink4Description=https://datasheet.ciiva.com/895/1smb5913bt3-d-895203.pdf?src-supplier=Digi-Key, ComponentLink5Description=https://datasheet.ciiva.com/895/1smb5913bt3-d-895204.pdf?src-supplier=Digi-Key, ComponentLink6Description=https://datasheet.ciiva.com/895/1smb5913bt3-d-895205.pdf?src-supplier=Digi-Key, ComponentLink6URL=https://datasheet.ciiva.com/895/1smb5913bt3-d-895205.pdf?src-supplier=Digi-Key, ComponentLink7Description=https://datasheet.ciiva.com/15198/getdatasheetpartid-311040-15198695.pdf?src-supplier=Verical, ComponentLink7URL=https://datasheet.ciiva.com/15198/getdatasheetpartid-311040-15198695.pdf?src-supplier=Verical, ComponentLink8Description=https://datasheet.ciiva.com/16311/1smb5913bt3-d-16311847.pdf?src-supplier=Future+Electronics, ComponentLink8URL=https://datasheet.ciiva.com/16311/1smb5913bt3-d-16311847.pdf?src-supplier=Future+Electronics, ComponentLink9Description=https://datasheet.ciiva.com/16472/1smb5913bt3-d-16472779.pdf?src-supplier=Avnet+Asia, ComponentLink9URL=https://datasheet.ciiva.com/16472/1smb5913bt3-d-16472779.pdf?src-supplier=Avnet+Asia, Contact Plating=Tin,Matte, Element Configuration=Single, ESD Protection=Yes, Halogen Free="Halogen Free", Height=2.13mm, Lead Free="Lead Free", Length=4.32mm, Material=Plastic, Max Reverse Leakage Current=5uA, Number of Pins=2, Packaging="Tape and Reel", Power Rating=3W, Pricing 1="1=0,45000, 10=0,31900, 100=0,16110, 500=0,14274, 1000=0,11109 (USD)", Radiation Hardening=No, REACH SVHC="No SVHC", Stoc Code=38, Supplier 1=Digikey, Voltage Tolerance=5%, Width=3.56mm, Zener Voltage=5.6V, Impedance=2R
D7 D8: library part 51, "DIODE SCHOTTKY 1200V 5A DPAK", Manufacturer="SMC Diode Solutions", MANUFACTURER P/N=S4D05120E1, Supplier Part Number 1=1655-S4D05120E1TR-ND, ComponentLink1Description=datasheet, ComponentLink1URL=https://www.smc-diodes.com/propdf/S4D05120E1%20N2429%20REV.B.pdf, Stoc Code=51, Supplier 1=Digikey
H1 H2 H3: library part 15, "TERM BLOCK HDR 3POS 5.08MM", Manufacturer="Same Sky (Formerly CUI Devices)", MANUFACTURER P/N=TBP01R1-508-03BE, Supplier Part Number 1=102-6407-ND, ComponentLink1Description=datasheet, ComponentLink1URL=https://www.cuidevices.com/product/resource/tbp01r1-508.pdf, Stoc Code=15, Supplier 1=Digikey
L1: library part 59, "100 nH Shielded Wirewound Inductor 37.5 A 1.7mOhm Max Nonstandard", Manufacturer="Bourns Inc.", MANUFACTURER P/N=SRP7028CC-R10Y, ComponentLink1Description=datasheet, ComponentLink1URL=https://www.bourns.com/docs/Product-Datasheets/SRP7028CC.pdf, Stoc Code=59, Supplier 1=Digikey, Supplier Part Number 1=SRP7028CC-R10Y
L2: library part 58, "220 nH Shielded Molded Inductor 23 A 2.8mOhm Max Nonstandard", Manufacturer="Pulse Electronics", MANUFACTURER P/N=BMRA00060630R22MA1, Supplier Part Number 1=553-BMRA00060630R22MA1TR-ND, ComponentLink1Description=datasheet, ComponentLink1URL=https://productfinder.pulseelectronics.com/api/open/part-attachments/datasheet/BMRA00060630R22MA1, Stoc Code=58, Supplier 1=Digikey
L3: library part 50, "FIXED IND 3.3UH 10A 14.4MOHM SMD", Manufacturer="Vishay Dale", MANUFACTURER P/N=IHLP4040DZER3R3M01, Supplier Part Number 1=541-1298-2-ND, ComponentLink1Description=datasheet, ComponentLink1URL=https://www.vishay.com/docs/34193/ihlp-4040dz-01.pdf, Stoc Code=50, Supplier 1=Digikey
L4: library part 52, "180 µH Shielded Toroidal Inductor 7.2 A 55mOhm Max Radial, Vertical (Open)", Manufacturer="Bourns Inc.", MANUFACTURER P/N=2300HT-181-V-RC, Supplier Part Number 1=2300HT-181-V-RC-ND, ComponentLink1Description=datasheet, ComponentLink1URL=https://www.bourns.com/docs/Product-Datasheets/2300ht_series.pdf, Stoc Code=52, Supplier 1=Digikey
Q1 Q2 Q4 Q5: library part 49, "N-Channel 650 V 25A (Tc) 32W (Tc) Through Hole PG-TO220-FP", Manufacturer="Infineon Technologies", MANUFACTURER P/N=IPAN60R125PFD7SXKSA1, Supplier Part Number 1=448-IPAN60R125PFD7SXKSA1-ND, ComponentLink1Description=datasheet, ComponentLink1URL=https://www.infineon.com/dgdl/Infineon-IPAN60R125PFD7S-DataSheet-v02_01-EN.pdf?fileId=5546d4626df6ee62016e224bf53a667c, Stoc Code=49, Supplier 1=Digikey
Q3: library part 24, "TRANS NPN 80V 0.5A SOT-23-3", Case/Package=SOT-23, Collector Base Voltage (VCBO)=60V, Collector Emitter Breakdown Voltage=40V, Collector Emitter Saturation Voltage=300mV, Continuous Collector Current=200mA, Emitter Base Voltage (VEBO)=6V, Frequency=300MHz, Manufacturer="Diodes Incorporated", MANUFACTURER P/N=MMBTA06-7-F, Max Operating Temperature=150°C, Max Power Dissipation=300mW, Min Operating Temperature=-55°C, Package Quantity=3000, Power Dissipation=350mW, Supplier Part Number 1=MMBTA06-FDITR-ND, Category=BJTs, Collector Emitter Voltage (VCEO)=40V, Collector-emitter Voltage-Max=300mV, ComponentLink1Description=datasheet, ComponentLink1URL=https://www.diodes.com/assets/Datasheets/MMBTA05_MMBTA06.pdf, Contact Plating=Tin,Matte, Designed by=YYunus, Element Configuration=Single, Gain Bandwidth Product=300MHz, Height=1mm, hFE Min=100, Lead Free="Lead Free", Length=3.05mm, Max Breakdown Voltage=40V, Max Collector Current=200mA, Max Frequency=300MHz, Mount="Surface Mount", Number of Elements=1, Number of Pins=3, Packaging="Tape and Reel", Polarity=NPN, Pricing 1="1=0,12000, 10=0,08600, 25=0,08280, 100=0,04660, 500=0,03664, 1000=0,02544 (USD)", Radiation Hardening=No, REACH SVHC="No SVHC", RoHS Compliant=Yes, Series=-, Stoc Code=24, Stock 1=2393281, Supplier 1=Digikey, Transition Frequency=300MHz, Voltage Rating (DC)=40V, Weight=0.000282oz, Width=1.4mm
R1 R4 R13: library part 25, "RES SMD 2K OHM 0.1% 1/8W 0805", Manufacturer="Panasonic Electronic Components", MANUFACTURER P/N=ERA-6AEB202V, Supplier Part Number 1=P2.0KDATR-ND, Stoc Code=25, Supplier 1=Digikey
R2 R20 R27 R29 R33 R35: library part 23, "RES SMD 10K OHM 0.5% 1/10W 0805", Manufacturer=Susumu, MANUFACTURER P/N=RR1220P-103-D, Supplier Part Number 1=RR12P10.0KDTR-ND, Stoc Code=23, Supplier 1=Digikey
R3 R5 R38 R39: library part 28, "RES SMD 0 OHM JUMPER 1/8W 0805", Manufacturer="Panasonic Electronic Components", MANUFACTURER P/N=ERJ-6GEY0R00V, Supplier Part Number 1=P0.0ATR-ND, Stoc Code=28, Supplier 1=Digikey
R6: library part 64, "RES SMD 20 OHM 0.5% 1/4W 0805", Manufacturer="Stackpole Electronics Inc", MANUFACTURER P/N=RNCF0805DTE20R0, Supplier Part Number 1=738-RNCF0805DTE20R0TR-ND, Stoc Code=64, Supplier 1=Digikey
R7 R10: library part 19, "RES SMD 15K OHM 5% 1/8W 0805", Manufacturer=Meritek, MANUFACTURER P/N=CR10153J, Supplier Part Number 1=2997-CR10153JTR-ND, Stoc Code=19, Supplier 1=Digikey
R8 R30 R31 R36 R37: library part 20, "CRCW0805 50 1% 100 RT1", Manufacturer="Vishay Dale", MANUFACTURER P/N=CRCW080550R0FKTA, Supplier Part Number 1=541-CRCW080550R0FKTATR-ND, Stoc Code=20, Supplier 1=Digikey
R12: library part 29, "RES 510 OHM 5% 1/8W 0805", Manufacturer="Stackpole Electronics Inc", MANUFACTURER P/N=RMCF0805JT510R, Supplier Part Number 1=RMCF0805JT510RTR-ND, Stoc Code=29, Supplier 1=Digikey
R14 R21: library part 30, "RES 82K OHM 1% 1/4W 0805", Manufacturer="KOA Speer Electronics, Inc.", MANUFACTURER P/N=RK73H2ATTD8202F, Supplier Part Number 1=2019-RK73H2ATTD8202FTR-ND, Stoc Code=30, Supplier 1=Digikey
R15: library part 33, "RES 5.1K OHM 5% 1/8W 0805", Manufacturer=YAGEO, Supplier Part Number 1=311-5.1KARTR-ND, MANUFACTURER P/N="RES 5.1K OHM 5% 1/8W 0805", Stoc Code=33, Supplier 1=Digikey
R16: library part 21, "RES SMD 1K OHM 0.5% 1/10W 0805", Manufacturer=Susumu, MANUFACTURER P/N=RR1220P-102-D, Supplier Part Number 1=RR12P1.0KDTR-ND, Stoc Code=21, Supplier 1=Digikey
R17: library part 36, "RES 12K OHM 5% 1/8W 0805", Manufacturer="Stackpole Electronics Inc", MANUFACTURER P/N=RMCF0805JT12K0, Supplier Part Number 1=738-RMCF0805JT12K0TR-ND, Stoc Code=36, Supplier 1=Digikey
R18: library part 39, "RES 470K OHM 1% 1/8W 0805", Manufacturer=YAGEO, MANUFACTURER P/N=RC0805FR-07470KL, Supplier Part Number 1=311-470KCRTR-ND, Stoc Code=39, Supplier 1=Digikey
R19: library part 37, "RES SMD 1.87K OHM 1% 1/20W 0201", Manufacturer="Panasonic Electronic Components", MANUFACTURER P/N=ERJ-1GNF1871C, Supplier Part Number 1=P122796TR-ND, Stoc Code=37, Supplier 1=Digikey
R22 R24 R26 R28 R32 R34: library part 43, "RES SMD 5 OHM 1% 1/5W 0805", Manufacturer="VPG Foil Resistors", MANUFACTURER P/N=Y40145R00000F9W, Supplier Part Number 1=804-1162-ND, Stoc Code=43, Supplier 1=Digikey
R23 R25: library part 45, "RES 2 OHM 1% 1/8W 0805", Manufacturer=YAGEO, MANUFACTURER P/N=RC0805FR-072RL, Supplier Part Number 1=311-2.00CRTR-ND, Stoc Code=45, Supplier 1=Digikey
S: library part 61, "981AS90 AL.SOĞUTUCU", Manufacturer=ARMA, MANUFACTURER P/N="981AS90 AL.SOĞUTUCU", Stoc Code=61, Supplier 1=Özdisan, Supplier Part Number 1="981AS90 AL.SOĞUTUCU"
T1: library part 17, "CURR SENSE XFMR 1:100 20A SMD", Manufacturer="Pulse Electronics", MANUFACTURER P/N=PA1005.100QNLT, Supplier Part Number 1=553-PA1005.100QNLTTR-ND, ComponentLink1Description=datasheet, ComponentLink1URL=https://productfinder.pulseelectronics.com/api/open/part-attachments/datasheet/PA1005.100QNLT, Stoc Code=17, Supplier 1=Digikey
T2: library part 53, "BOBBIN COIL FORMER E 55X28X21", Manufacturer="Miles Platts Ltd", MANUFACTURER P/N=FE0270FGNNAT0001, Supplier Part Number 1=5443-FE0270FGNNAT0001-ND, ComponentLink1Description=datasheet, ComponentLink1URL=https://milesplatts.co.uk/Content/Downloads/UPDATED%20Datasheets/FE0270.pdf, Stoc Code=53, Supplier 1=Digikey
U1: library part 16, "IC OFFLINE SW FULL-BRDG 20SOIC", Manufacturer="Texas Instruments", MANUFACTURER P/N=UCC3895DWTR, Supplier Part Number 1=296-27167-2-ND, ComponentLink1Description=datasheet, ComponentLink1URL=https://www.ti.com/general/docs/suppproductinfo.tsp?distId=10&gotoUrl=https%3A%2F%2Fwww.ti.com%2Flit%2Fgpn%2Fucc1895, Stoc Code=16, Supplier 1=Digikey
U2: library part 35, "OPTOISO 4.17KV TRANS W/BASE 6SMD", Manufacturer=onsemi, MANUFACTURER P/N=CNY172SM, Supplier Part Number 1=CNY172SM-ND, ComponentLink1Description=datasheet, ComponentLink1URL=https://www.onsemi.com/pdf/datasheet/cny17f4m-d.pdf, Stoc Code=35, Supplier 1=Digikey
U3: library part 41, "IC VREF SHUNT ADJ 1% SOT23-3", Manufacturer="Texas Instruments", MANUFACTURER P/N=TL431AIDBZR, Supplier Part Number 1=296-17329-2-ND, Stoc Code=41, Supplier 1=Digikey
U4 U5: library part 42, "Half-Bridge Gate Driver IC Non-Inverting 14-SOP", Manufacturer=UMW, MANUFACTURER P/N=UCC27714DR, Supplier Part Number 1=4518-UCC27714DRTR-ND, ComponentLink1Description=datasheet, ComponentLink1URL=https://www.umw-ic.com/static/pdf/97fabd9c8eb2de24966959d8d4a51e75.pdf, Stoc Code=42, Supplier 1=Digikey

## Via types
v1: diameter 0.7, hole 0.4, Top Layer to Bottom Layer, 32 vias
v2: diameter 0.7, hole 0.5, Top Layer to Bottom Layer, 12 vias
v3: diameter 0.9, hole 0.5, Top Layer to Bottom Layer, 1 vias

## Nets (pads, with @x,y where several pads share a name; then routed paths per layer and width w, separated by ;. In a path a pad name is that pad's centre, name@x,y a point inside that pad or via, vN(x,y) a via of type N, cw(c..) or ccw(c..) an arc to the next point about the centre after c; other vN are vias at no path point)
140V_GND: C14.2 C15.2 C16.2 D6.A D7.3 D8.3 H2.1 R20.1 U3.2 | length 22.7
  Top Layer w0.7: R20.1 41.417,2.311 41.978,1.75 47.425,1.75 47.975,2.3 47.975,5.525 ; D6.A 46.045,7.955 U3.2 47.975,5.525 ; C14.2 51.55,9.1 47.975,5.525
140V_OUT: C14.1 C15.1 C16.1 H2.3 L4.1 R8.2
+12V_IC: C4.2 C5.2 C6.2 C17.2 C18.2 H3.1 R22.1 R24.1 U1.15 | length 77.8
  Top Layer w0.7: H3.1 20.175,10.275 23.7,13.8 23.7,32.7 v2(28.1,37.1) ; R22.1 44.139,39.947 44.062,39.869 C17.2 44.062,39.5 46.6,39.5 v2(47.8,38.3) 47.809,38.291 47.809,31.069 47.61,30.87 U1.15 ; C18.2@51.185,36.265 51.185,35.84 51.25,35.776 51.25,34.79 51.239,34.778 51.239,34.183 R24.1@51.233,34.178
  Bottom Layer w0.7: v2(28.1,37.1) 46.6,37.1 v2(47.8,38.3) 50.875,35.225 v2(51.25,35.225)
A: R30.1 U1.18 | length 2.7
  Top Layer w0.7: U1.18 43.8,31.6 43.934,31.734 43.934,32.856 R30.1
B: R36.1 U1.17 | length 5.5
  Top Layer w0.7: R36.1 43.939,34.357 43.945,34.351 44.909,34.351 44.996,34.264 44.996,31.65 45.02,31.626 45.02,30.29 U1.17
C: R31.1 U1.14 | length 12.7
  Top Layer w0.7: U1.14 48.88,41.784 48.967,41.871 49.678,41.871 49.683,41.877 R31.1
CS: C12.1 R5.2 R12.1 R16.1 U1.12 | length 90.6
  Top Layer w0.7: R16.1 31.011,46.111 30.1,45.2 30.1,24.9 v2(31.4,23.6) ; v2(32.8,21.6) 32.8,15.9 35.7,13 55.8,13 57.3,14.5 57.3,17.9 56.479,18.721 55.481,18.721 R12.1 55.475,21.391 51.47,25.396 51.47,30.19 U1.12 ; 55.475,21.345 56.75,22.62 C12.1 56.75,27.7 56.752,27.702 R5.2
  Bottom Layer w0.7: v2(31.4,23.6) 32.8,22.2 v2(32.8,21.6)
D: R37.1 U1.13 | length 9
  Top Layer w0.7: U1.13 50.15,37.55 51,38.4 51,38.841 51.006,38.846 R37.1
drv1VDD: C26.2 R24.2 R25.1 U5.7 | length 5.1
  Top Layer w0.7: R24.2@53.036,34.178 54.112,34.178 54.153,34.219 U5.7 54.928,34.219 54.953,34.194 54.953,33.806 54.968,33.792 C26.2 54.968,32.505 53.642,32.505 53.636,32.5 R25.1
drv2VDD: C25.2 R22.2 R23.1 U4.7 | length 5.4
  Top Layer w0.7: U4.7 42.194,40.843 42.336,40.986 R22.2 R23.1
EAN: U1.1 U1.2 | length 1.3
  Top Layer w0.7: U1.1 U1.2
EAP: C11.2 R13.1 R15.2 U1.20 U2.5 | length 34.8
  Top Layer w0.7: U2.5 27.8,6.5 28.45,7.15 28.45,13.025 31.5,16.075 31.5,22.049 34.548,25.097 34.548,29.648 35,30.1 35.823,30.1 R13.1 R15.2 41.21,30.102 41.26,30.152 U1.20
GND_HV: C1.2 C2.2 C27.2 C28.2 C29.2 D3.1 D9.2 H3.3 Q4.3 Q5.3 R1.2 R6.2 R33.2 R35.2 R38.2 R39.2 T1.3 U2.4 | length 1.9
  Top Layer w0.7: v2(24,9) 24.04,9.04 U2.4
  other v1: 32.3,47.7 32.5,50.1 34.9,50.1 29.1,52.9 27.2,54.7
GND_IC: C3.1 C4.1 C5.1 C6.1 C7.1 C8.1 C9.1 C10.1 C11.1 C12.2 C17.1 C18.1 C21.1 C22.1 C23.1 C24.1 C25.1 C26.1 R3.2 R7.1 R10.1 R14.1 R15.1 R38.1 R39.1 U1.5 U1.16 U4.3 U4.5 U5.3 U5.5
  other v1: 37,15 39,15 41,15 46.786,15.512 48.9,15.512 50.897,15.512 52.952,15.512 54.165,15.512 39,21 37.5,25.25 54.75,25.25 45,28 47,28 41.25,28.25 35.076,31.104 36.424,31.395 35.051,32.007 44,36 52.625,37.675 41,39 41.75,44.75 43.75,44.75 45.75,44.75 47.75,44.75 49.75,44.75 51.75,44.75 53.75,44.75
HO1: R28.1 U5.12 | length 12
  Top Layer w0.7: U5.12 58.71,39.299 58.3,38.889 58.3,33.5 59.1,32.7 61.41,32.7 61.497,32.787 61.497,33.681 61.503,33.686 R28.1
HO2: R26.1 U4.12 | length 2
  Top Layer w0.7: R26.1 33.285,35.848 33.37,35.763 U4.12
HOA: Q2.1 R28.2 R29.1 | length 96.1
  Top Layer w0.7: R28.2@61.874,35.516 63.116,35.516 65.7,38.1 65.7,71.765 66.11,72.175 92.175,72.175 93.5,73.5 93.5,88.5 89.755,92.245 Q2.1
  Bottom Layer w0.7: Q2.1 82.716,92.211 82.716,90.657 82.722,90.652 R29.1
HOC: Q1.1 R26.2 R27.1 | length 68.1
  Top Layer w0.7: R26.2 31.825,43.4 36.654,48.229 56.929,48.229 59.9,51.2 59.9,77.495 Q1.1
  Bottom Layer w0.7: Q1.1 60.309,80.017 60.719,80.427 61.843,80.427 61.848,80.433 R27.1
HSAB: C20.1 L3.1 Q2.3 Q5.2 R29.2 U5.11 | length 57.7
  Top Layer w0.7: U5.11 59.986,38.05 C20.1 ; C20.1@61.687,38.087 62.587,38.087 64.5,40 64.5,71.914 65.782,73.196 79.171,73.196 80.122,74.147 Q5.2
HSCD: C19.1 Q1.3 Q4.2 R27.2 T2.1 U4.11 | length 70
  Top Layer w0.7: U4.11 34.736,37.033 35.146,37.443 35.146,44.071 38.35,47.275 57.375,47.275 61.175,51.075 61.175,73.69 Q1.3
  Bottom Layer w0.7: R27.2 64.979,80.75 65.389,80.34 Q1.3
LOB: Q5.1 R34.2 R35.1 | length 53
  Top Layer w0.7: R34.2 57.652,44.852 63.4,50.6 63.4,72.163 65.387,74.15 76.4,74.15 77.525,75.275 77.525,77.851 Q5.1
  Bottom Layer w0.7: Q5.1 77.8,77.69 77.8,75.91 78.21,75.5 R35.1
LOD: Q4.1 R32.2 R33.1 | length 79.3
  Top Layer w0.7: R32.2@38.672,43.982 38.672,44.972 40.021,46.321 57.772,46.321 62.3,50.849 62.3,72.412 65.779,75.891 70.641,75.891 v3(70.75,76)
  Bottom Layer w0.7: Q4.1@65.425,92.304 Q4.1 65.55,92.25 69.25,92.25 70.75,90.75 v3(70.75,76)
NetC2_1: C2.1 D1.1 D1.3 D2.2
NetC3_2: C3.2 Q3.1 U1.7 | length 25.9
  Top Layer w0.7: Q3.1 36.394,16.386 36.394,16.424 35.254,17.564 35.254,23.054 36,23.8 47.7,23.8 48.9,22.6 48.9,20.98 U1.7 48.9,20.94 48.9,19.8 48.8,19.7 48.8,19.05 48.775,19.025 48.775,18.725 C3.2
NetC8_2: C8.2 U1.19 | length 6.2
  Top Layer w0.7: C8.2 41.89,26.75 42.53,27.39 U1.19
NetC13_1: C13.1 R20.2 R21.1 U3.1 | length 7.7
  Top Layer w0.7: R21.1 39.619,3.212 40.515,4.109 41.094,4.109 R20.2 41.417,4.114 42.482,3.05 C13.1 45.582,3.05 46.007,3.475 U3.1
NetC13_2: C13.2 D6.C R19.1 U3.3 | length 8.1
  Top Layer w0.7: R19.1 D6.C 41.675,7.925 41.675,6.75 42.025,6.75 42.8,5.975 C13.2 44.062,4.95 U3.3@44.217,4.795
NetC19_2: C19.2 D11.1 U4.13 | length 12.1
  Top Layer w0.7: U4.13 35.393,34.493 36.542,35.642 36.542,42.087 36.55,42.095 C19.2@36.55,42.798
  Bottom Layer w0.7: D11.1 36.542,34.116 v2(36.542,35.678)
NetC20_2: C20.2 D10.1 U5.13 | length 8.2
  Top Layer w0.7: U5.13 61.39,40.569 61.5,40.459 61.5,39.95 C20.2 v2(61.8,41.2)
  Bottom Layer w0.7: D10.1 61.798,41.202 v2(61.8,41.2)
NetC21_2: C21.2 R30.2 U4.1 | length 5.4
  Top Layer w0.7: U4.1 39.207,33.198 40.392,33.198 40.7,32.89 ; C21.2 39.505,31.845 40.245,31.845 40.7,32.3 40.7,32.89 ; R30.2 42.136,32.884 42.13,32.89 40.7,32.89
NetC22_2: C22.2 R31.2 U5.1 | length 3.4
  Top Layer w0.7: R31.2 51.486,41.877 51.492,41.871 51.81,41.871 51.842,41.839 U5.1
NetC23_2: C23.2 R36.2 U4.2 | length 3.1
  Top Layer w0.7: U4.2 C23.2 42.13,34.493 42.136,34.499 R36.2
NetC24_2: C24.2 R37.2 U5.2 | length 3.5
  Top Layer w0.7: R37.2 54.072,40.65 54.153,40.569 U5.2
NetD1_2: D1.2 L2.2
NetD2_1: D2.1 D2.3 D4.1 L1.2 Q1.2 Q2.2
NetD3_2: D3.2 H1.1 | length 17.7
  Top Layer w2.6: D3.2 22.857,92.677 24.38,94.2 34.297,94.2 35.62,92.877 H1.1
NetD3_3: D3.3 H1.3 | length 37.4
  Top Layer w2.6: D3.3 17.777,94.177 21.3,97.7 42.2,97.7 45.78,94.12 H1.3
NetD4_2: D4.2 D9.1 L3.2 T2.6
NetD5_1: D5.1 R6.1 R16.2 | length 5.6
  Top Layer w0.7: R16.2 R16.2@31.037,53.483 ; R6.1@31.075,54.481 31.048,54.481 31.043,54.476 31.043,53.488 R16.2@31.037,53.483 ; D5.1 35,53.09 34.59,53.5 32.923,53.5 32.906,53.483 R16.2@31.037,53.483
NetD5_2: D5.2 R1.1 T1.1 | length 4.2
  Top Layer w0.7: T1.1 32.524,57.707 32.524,56.818 32.713,56.629 32.713,56.312 32.719,56.306 R1.1 33.041,56.311 34.995,56.311 D5.2
NetD7_2: D7.2 T2.12
NetD8_2: D8.2 T2.7
NetD10_2: D10.2 R25.2 | length 9.3
  Top Layer w0.7: v2(51.104,32.3) 51.827,32.3 51.833,32.306 R25.2
  Bottom Layer w0.7: v2(51.104,32.3) 56.79,32.3 57.2,32.71 57.2,34.869 D10.2
NetD11_2: D11.2 R23.2 | length 11
  Top Layer w0.7: R23.2 44.139,43.106 44.145,43.1 v2(44.9,43.1)
  Bottom Layer w0.7: D11.2 37.1,40.922 37.1,41.9 38.3,43.1 v2(44.9,43.1)
NetL1_1: L1.1 L2.1 T1.7
NetL4_2: L4.2 T2.9 T2.10
NetQ3_2: Q3.2 R4.2 | length 2.9
  Top Layer w0.7: Q3.2 40.49,16.33 40.577,16.417 40.577,16.918 40.583,16.923 R4.2
NetR3_1: R3.1 R5.1 U1.11 | length 3.4
  Top Layer w0.7: U1.11 54.808,30.24 54.948,30.1 R5.1
NetR7_2: R7.2 U1.9 | length 2.6
  Top Layer w0.7: U1.9 51.47,20.91 51.47,19.73 51.602,19.598 51.602,18.732 51.608,18.727 R7.2
NetR8_1: R8.1 R18.2 U2.1 | length 3.6
  Top Layer w0.7: U2.1 35.888,3.96 36.098,3.75 ; R8.1 36.098,3.75 ; R18.2 36.098,3.75
NetR10_2: R10.2 U1.10 | length 2.9
  Top Layer w0.7: U1.10 52.73,21 53,21 53.7,20.3 R10.2
NetR14_2: R14.2 U1.8 | length 2.2
  Top Layer w0.7: R14.2 U1.8
NetR17_1: R17.1 R19.2 | length 1
  Top Layer w0.7: R17.1 37.907,6.906 38.894,6.906 R19.2
NetR17_2: R17.2 U2.2 | length 2
  Top Layer w0.7: U2.2 35.686,6.5 35.775,6.589 36.093,6.589 36.098,6.595 R17.2
NetR18_1: R18.1 R21.2 | length 1.7
  Top Layer w0.7: R18.1 37.902,5.005 37.907,5.01 39.296,5.01 R21.2
NetR32_1: R32.1 U4.6 | length 4.6